# Altium PCB PULpino.PcbDoc
Units mm, origin at the board's own origin, x right, y up, seen from the top; angles counter-clockwise.
Board outline 63 x 34 mm, 2 copper layers (L1, L2), stack 1.671 mm thick; 36 components, 38 nets, 212 pads, 66 vias.
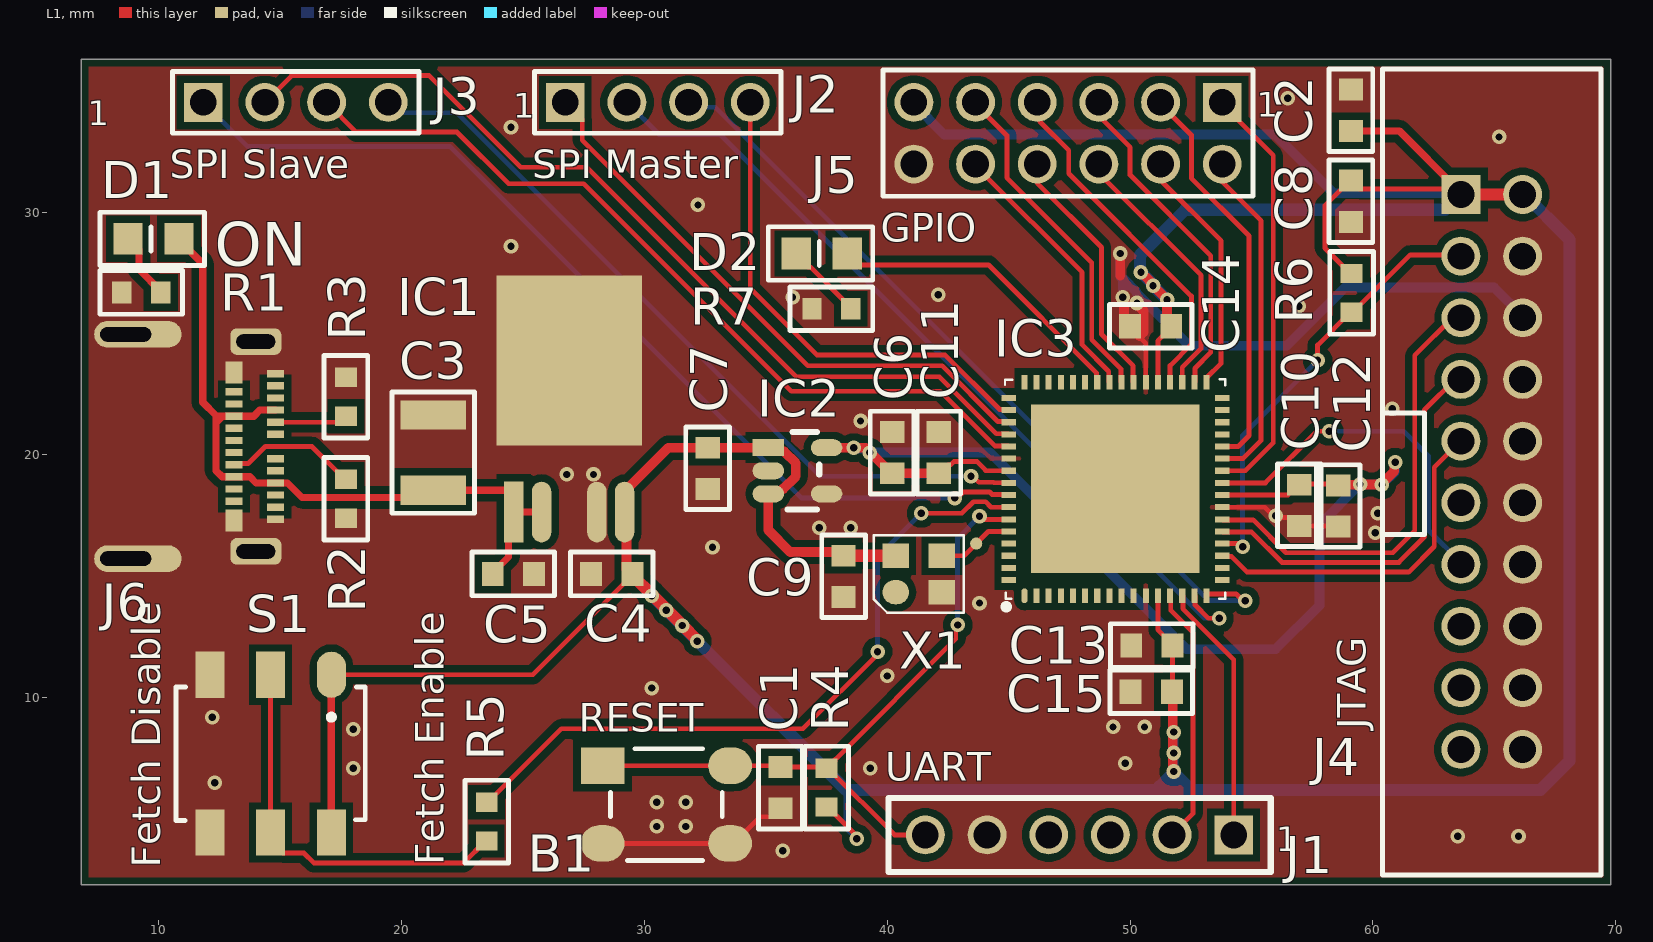
[diagram p0: L1 view]
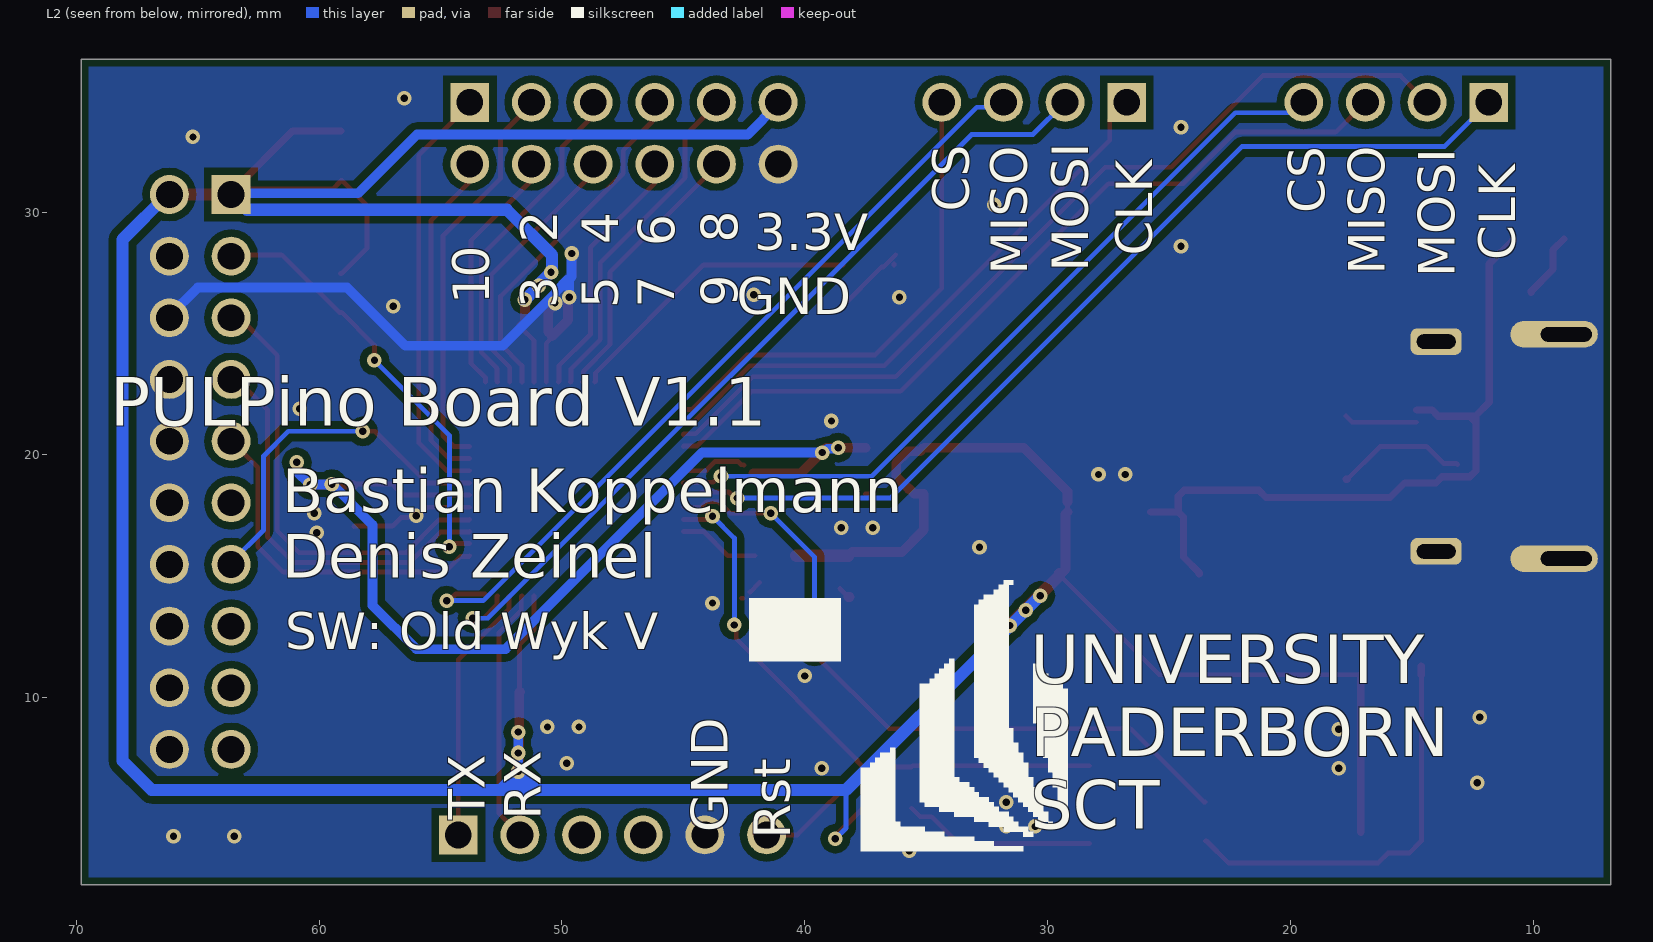
[diagram p1: L2 view, seen from below]
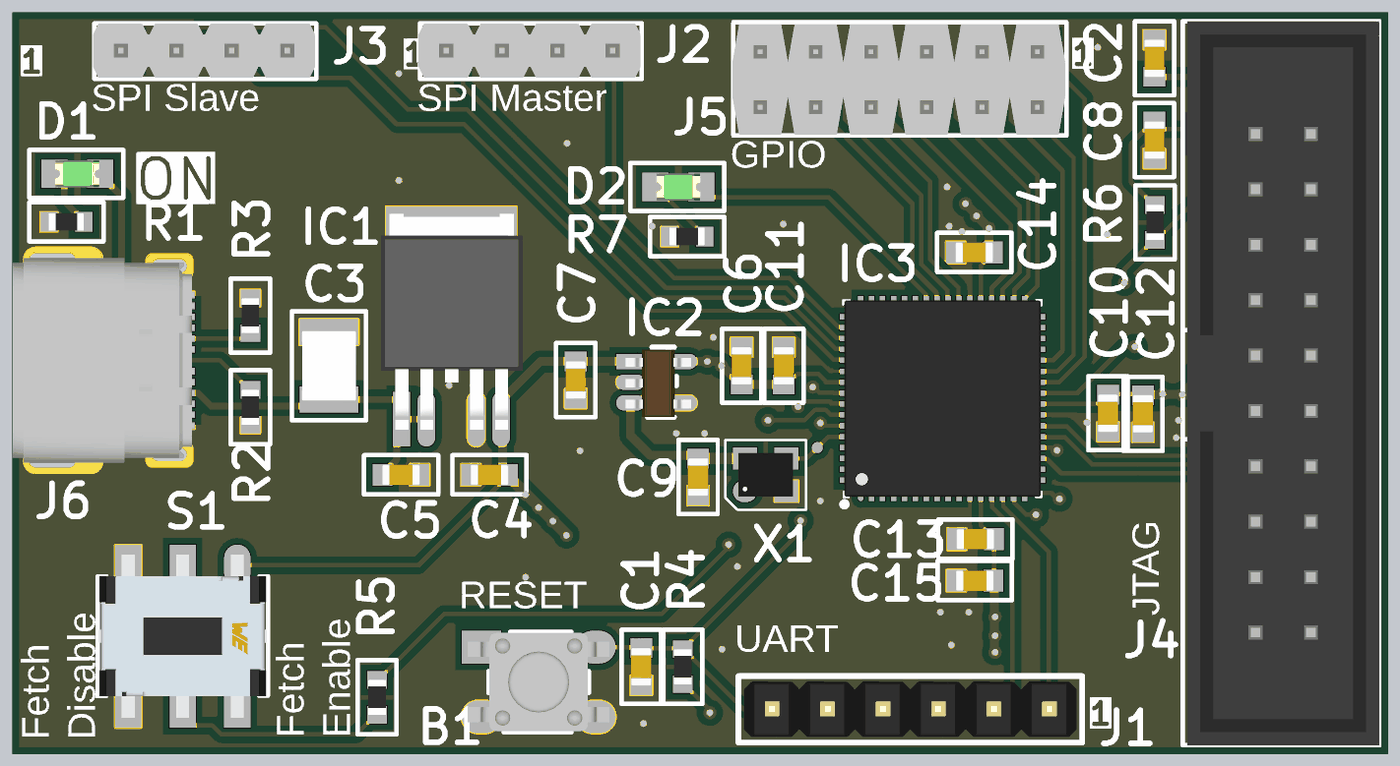
[diagram p2: 3D render of the assembled board from above, using the file's embedded part models]

## Layer stack, top to bottom
Top Solder: solder mask 0.0102, Solder Resist, Dk 3.5
L1: signal copper 0.0356
Dielectric 1: dielectric 1.6, FR-4, Dk 4.8
L2: signal copper 0.0356
Bottom Solder: solder mask 0.0102, Solder Resist, Dk 3.5

## Board outline
6.8,2.3 69.8,2.3 69.8,36.3 6.8,36.3

## Design rules (kind name [scope] priority, off if disabled: settings)
BoardOutlineClearance [All] p1: gap=0.2 ignorepadtopadclearanceinfootprint=FALSE
Clearance "Arround Polygon" [IsRegion] p1: gap=0.3 ignorepadtopadclearanceinfootprint=FALSE
Clearance [All] p2: gap=0.2 ignorepadtopadclearanceinfootprint=FALSE
DiffPairsRouting [All] p1: maxlimit=0.35 minlimit=0.3 mostfreqgap=0.35 toplayer_minwidth=0.205 toplayer_maxwidth=0.254 toplayer_prefwidth=0.23 bottomlayer_minwidth=0.205 bottomlayer_maxwidth=0.254 bottomlayer_prefwidth=0.23 maxuncoupledlength=12.7
FabricationTestPointUsage FabricationTestPointUsage_1 [All] p1: valid=0 allowmultiple=FALSE
FabricationTestpoint FabricationTestpoint_1 [All] p1: side=3 testpointundercomponent=TRUE minsize=1.016 maxsize=2.54 preferedsize=1.524 minholesize=0 maxholesize=1.016 preferedholesize=0.813 testpointgrid=0.025 allowsidetop=TRUE allowsidebottom=TRUE usegrid=TRUE gridtolerance=0
FabricationTestpoint FabricationTestpoint_2 [All] p2: side=3 testpointundercomponent=TRUE minsize=1.016 maxsize=2.54 preferedsize=1.524 minholesize=0 maxholesize=1.016 preferedholesize=0.813 testpointgrid=0.025 allowsidetop=TRUE allowsidebottom=TRUE usegrid=TRUE gridtolerance=0
HoleSize FabricationTestpoint [All] p1 off: absolutevalues=TRUE maxlimit=2.54 minlimit=0.03 maxpercent=80.000 minpercent=20.000
HoleSize [All] p2: absolutevalues=TRUE maxlimit=10 minlimit=0.3 maxpercent=80.000 minpercent=20.000
HoleSize FabricationTestPointUsage [All] p3 off: absolutevalues=TRUE maxlimit=2.54 minlimit=0.03 maxpercent=80.000 minpercent=20.000
MinimumSolderMaskSliver SilkscreenOverComponentPads [All] p1: minsoldermaskwidth=0.1
MinimumSolderMaskSliver [All] p2: minsoldermaskwidth=0.08
PlaneClearance [All] p1: clearance=0.5
PolygonConnect [All] p1: connectstyle=Direct reliefconductorwidth=0.254 reliefentries=4 polygonreliefangle="90 Angle" airgapwidth=0.254
RoutingCorners [All] p1: cornerstyle=45-Degree minsetback=1.25 maxsetback=1.25
RoutingVias [All] p1: holewidth=0.3 width=0.6 viastyle="Through Hole" minholewidth=0.3 minwidth=0.6 maxholewidth=0.3 maxwidth=0.6
SilkToSilkClearance [All] p1: silktosilkclearance=0.1
SilkToSolderMaskClearance [IsPad] p1: minsilkscreentomaskgap=0.1 clearancetoexposedcopper=TRUE
SolderMaskExpansion [All] p1: expansion=0.05 istentingtop=FALSE
Width Width_POWER [InNet('+1.2V') or InNet('+3.3V')or InNet('+5V')or InNet('GND')] p1: maxlimit=2 minlimit=0.2 preferedwidth=0.3
Width [All] p2: maxlimit=4 minlimit=0.2 preferedwidth=0.3
21 further rules are at their usual default settings.

## Classes and differential pairs
net class GPIO_[0..9]: GPIO_0 GPIO_1 GPIO_2 GPIO_3 GPIO_4 GPIO_5 GPIO_6 GPIO_7 GPIO_8 GPIO_9

## Components (designator, comment, footprint, x,y, rotation, side; value= is the part's Value field where it differs from the comment)
B1 "Push Button" "PUSH SWITCH" 30.9,5.6 r0 top
C1 "100nF/ 50V" C0603 35.6,6.3 r270 top
C2 "100nF/ 50V" C0603 59.1,34.2 r270 top
C3 "47µF/ 16V" C1210 21.3,20.1 r270 top
C4 "1µF/ 16V" C0603 28.65,15.1 r0 top
C5 "100nF/ 50V" C0603 24.6,15.1 r180 top
C6 "1µF/ 16V" C0603 40.2,20.1 r270 top
C7 "100nF/ 50V" C0603 32.6,19.45 r90 top
C8 "100nF/ 50V" C0603 59.1,30.45 r270 top
C9 "100nF/ 50V" C0603 38.2,15 r270 top
C10 "100nF/ 50V" C0603 56.975,17.925 r90 top
C11 "100nF/ 50V" C0603 42.125,20.1 r270 top
C12 "1µF/ 16V" C0603 58.575,17.9 r90 top locked
C13 "100nF/ 50V" C0603 50.9,12.15 r0 top
C14 "100nF/ 50V" C0603 50.85,25.3 r0 top
C15 "1µF/ 16V" C0603 50.875,10.25 r0 top
D1 "Green LED" LED_0805 9.775,28.9 r180 top
D2 "Green LED" LED_0805 37.3,28.3 r180 top
IC1 "TLS850B0TEV33ATMA1" TO-252-5 24.62,17.65 r90 top
IC2 "NCP115ASN120T2G" TSOP-5 35.1,20.3 r0 top
IC3 "PULPino V1 by Bastian Koppelmann" "MQFN 64-LEAD 9MM P=0.5MM" 45.65,14.2 r90 top
J1 "Header_6pin_Male" HEADER_6PIN_MALE 54.27,4.35 r180 top
J2 "4-Pin 2.54 Male" "DIP4 4X1 PITCH 2.54MM" 26.735,34.525 r0 top
J3 "4-Pin 2.54 Male" "DIP4 4X1 PITCH 2.54MM" 11.825,34.525 r0 top
J4 "JTAG 20 Pin Male 2.54mm" "JTAG 20-PIN" 63.63,30.73 r90 top locked
J5 "2x6 Pin Male 2.54mm" "DIP12 2X6 PITCH 2.54MM" 41.095,34.525 r180 top
J6 "USB-C Molex 201267-0005" "USB-C MOLEX 2012670005" 14.8,23.35 r270 top
R1 "150" R0603 8.475,26.7 r0 top
R2 "5k" R0603 17.7,17.4 r90 top
R3 "5k" R0603 17.7,23.2 r270 top
R4 "10k" R0603 37.5,7.1 r270 top
R5 "10k" R0603 23.5,4.1 r90 top
R6 "10k" R0603 59.125,25.875 r90 top
R7 "100" R0603 36.9,26.025 r0 top
S1 "Slide Switch" "SLIDE SWITCH WE 452403012014" 14.6,7.7 r180 top
X1 "50MHz" "QFN 2520 SiT1602 Oscillators 2.5x2.0mm" 41.3,15.1 r0 top

## Footprints (in the part's own frame and the unit in brackets; to place one, negate y for a bottom-side part, rotate by r counter-clockwise, add the part's x,y. Pads: shape width x height; smd on the part's side, far side on the other; paste and mask are expansions set on the pad)
C0603 [mm]
  rect 0.9x1 smd: 1(-0.85,0) 2(0.85,0)
  silkscreen extent -1.7,-0.9 1.7,0.9, body extent -0.87,-0.48 0.87,0.48, height 0.88
C1210 [mm]
  rect 1.2x2.7 smd: 1(-1.55,0) 2(1.55,0)
  silkscreen extent -2.5,-1.7 2.5,1.7, body extent -1.6,-1.25 1.6,1.25, height 1
"DIP4 4X1 PITCH 2.54MM" [mm]
  rect 1.6x1.6 hole 1.1: 1(0,0)
  round 1.6 hole 1.1: 2(2.54,0) 3(5.08,0) 4(7.62,0)
  silkscreen extent -1.27,-1.27 8.89,1.28, body extent -1.33,-1.22 8.83,1.28, height 9.26
"DIP12 2X6 PITCH 2.54MM" [mm]
  rect 1.6x1.6 hole 1.1: 1(-12.7,0)
  round 1.6 hole 1.1: 2(-12.7,2.54) 3(-10.16,0) 4(-10.16,2.54) 5(-7.62,0) 6(-7.62,2.54) 7(-5.08,0) 8(-5.08,2.54) 9(-2.54,0) 10(-2.54,2.54) 11(0,0) 12(0,2.54)
  silkscreen extent -13.97,-1.33 1.28,3.87, body extent -13.92,-1.24 1.32,3.84, height 9.26
HEADER_6PIN_MALE [mm]
  rect 1.6x1.6 hole 1.1: 1(0,0)
  round 1.6 hole 1.1: 2(2.54,0) 3(5.08,0) 4(7.62,0) 5(10.16,0) 6(12.7,0)
  silkscreen extent -1.52,-1.52 14.22,1.52, body extent -1.27,-1.27 13.97,1.27, height 9.2
"JTAG 20-PIN" [mm]
  rect 1.6x1.6 hole 1.1: 1(0,0)
  round 1.6 hole 1.1: 2(0,-2.54) 3(-2.54,0) 4(-2.54,-2.54) 5(-5.08,0) 6(-5.08,-2.54) 7(-7.62,0) 8(-7.62,-2.54) 9(-10.16,0) 10(-10.16,-2.54) 11(-12.7,0) 12(-12.7,-2.54) 13(-15.24,0) 14(-15.24,-2.54) 15(-17.78,0) 16(-17.78,-2.54) 17(-20.32,0) 18(-20.32,-2.54) 19(-22.86,0) 20(-22.86,-2.54)
  silkscreen extent -28.03,-5.77 5.17,3.23, body extent -28.03,-5.77 5.17,3.13, height 9
LED_0805 [mm] "Würth Elektronik (WE)"
  rect 1.2x1.3 smd: 1(-1.05,0) 2(1.05,0)
  silkscreen extent -2.1,-1.1 2.2,1.1, body extent -1.01,-0.62 1.01,0.63, height 1.1
"MQFN 64-LEAD 9MM P=0.5MM" [mm]
  oval 0.6x0.25 smd: 1(0,0)
  rect 0.6x0.25 smd: 2(0,-0.5) 3(0,-1) 4(0,-1.5) 5(0,-2) 6(0,-2.5) 7(0,-3) 8(0,-3.5) 9(0,-4) 10(0,-4.5) 11(0,-5) 12(0,-5.5) 13(0,-6) 14(0,-6.5) 15(0,-7) 16(0,-7.5) 33(8.8,-7.5) 34(8.8,-7) 35(8.8,-6.5) 36(8.8,-6) 37(8.8,-5.5) 38(8.8,-5) 39(8.8,-4.5) 40(8.8,-4) 41(8.8,-3.5) 42(8.8,-3) 43(8.8,-2.5) 44(8.8,-2) 45(8.8,-1.5) 46(8.8,-1) 47(8.8,-0.5) 48(8.8,0)
  rect 0.25x0.6 smd: 17(0.65,-8.15) 18(1.15,-8.15) 19(1.65,-8.15) 20(2.15,-8.15) 21(2.65,-8.15) 22(3.15,-8.15) 23(3.65,-8.15) 24(4.15,-8.15) 25(4.65,-8.15) 26(5.15,-8.15) 27(5.65,-8.15) 28(6.15,-8.15) 29(6.65,-8.15) 30(7.15,-8.15) 31(7.65,-8.15) 32(8.15,-8.15) 49(8.15,0.65) 50(7.65,0.65) 51(7.15,0.65) 52(6.65,0.65) 53(6.15,0.65) 54(5.65,0.65) 55(5.15,0.65) 56(4.65,0.65) 57(4.15,0.65) 58(3.65,0.65) 59(3.15,0.65) 60(2.65,0.65) 61(2.15,0.65) 62(1.65,0.65) 63(1.15,0.65) 64(0.65,0.65)
  rect 6.94x6.94 smd: 65(4.4,-3.75)
  silkscreen extent -0.49,-8.27 8.93,0.8, body extent -0.12,-8.27 8.92,0.77, height 0.9
"PUSH SWITCH" [mm]
  rect 1.8x1.5 smd: 1(-2.625,1.6)
  oval 1.8x1.5 smd: 2(-2.625,-1.6) 3(2.625,1.6) 4(2.625,-1.6)
  silkscreen extent -2.3,-2.3 2.3,2.3, body extent -3.25,-2.25 3.25,2.25, height 5
"QFN 2520 SiT1602 Oscillators 2.5x2.0mm" [mm]
  oval 1.1x1 smd: 1(-0.95,-0.75)
  rect 1.1x1 smd: 2(0.95,-0.75) 3(0.95,0.75) 4(-0.95,0.75)
  silkscreen extent -1.85,-1.6 1.85,1.6, body extent -1.25,-1 1.25,1, height 0.81
R0603 [mm]
  rect 0.8x0.9 smd: 1(0,0) 2(1.6,0)
  silkscreen extent -0.9,-0.9 2.5,0.9, body extent 0,-0.4 1.6,0.4, height 0.45
"SLIDE SWITCH WE 452403012014" [mm]
  oval 1.2x1.9 smd: 1(-2.5,-3.25)
  rect 1.2x1.9 smd: 2(0,-3.25) 3(2.5,-3.25) 4(-2.5,3.25) 5(0,3.25) 6(2.5,3.25)
  silkscreen extent -3.9,-2.75 3.9,2.75, body extent -3.85,-3.75 3.85,3.75, height 3.3
TO-252-5 [mm]
  rect 2.5x0.8 smd: 1(0,0)
  oval 2.5x0.8 smd: 2(0,-1.14) 4(0,-3.42) 5(0,-4.56)
  rect 7x6 smd: 3(6.25,-2.28)
  body extent -0.47,-5.55 9.43,0.95, height 2.3
TSOP-5 [mm]
  rect 1.3x0.7 smd: 1(0,0)
  oval 1.3x0.7 smd: 2(0,-0.95) 3(0,-1.9) 4(2.4,-1.9) 5(2.4,0)
  silkscreen extent 0.8,-2.55 2.1,0.65, body extent -0.23,-2.55 2.77,0.55, height 1.1
"USB-C MOLEX 2012670005" [mm]
  oval 1.1x3.6 hole 2.1 slot 0.6 at 0 deg copper offset 0,0.5: A1(-1.62,-6.17) A1(7.62,-6.17)
  rrect50% 1.1x2.1 hole 1.6 slot 0.6 at 0 deg: A1(-1.32,-0.81) A1(7.32,-0.81)
  rect 0.3x0.7 smd: A1(0,0) A2(0.5,0) A3(1,0) A4(1.5,0) A5(2,0) A6(2.5,0) A7(3.5,0) A8(4,0) A9(4.5,0) A10(5,0) A11(5.5,0) A12(6,0) B2(5.25,-1.7) B3(4.75,-1.7) B4(4.25,-1.7) B5(3.75,-1.7) B6(3.25,-1.7) B7(2.75,-1.7) B8(2.25,-1.7) B9(1.75,-1.7) B10(1.25,-1.7) B11(0.75,-1.7)
  rect 0.9x0.7 smd: B1(6.05,-1.7) B12(-0.05,-1.7)
  body extent -1.69,-7.97 7.69,0.33, height 3.72

## Part data
B1: library part "Push Button PTS647SM50SMTR2LFS", "PTS647SM50SMTR2LFS"
C1 C2 C5 C7 C8 C9 C10 C11 C13 C14: library part "C 100nF/ 50V", "C0603/C0805"
C3: library part "C 47µF/ 16V", "C1210"
C4 C6 C12 C15: library part "C 1µF/ 16V", "C0603/C0805"
D1 D2: library part "LED 0805", "Status LED"
IC1: "Input 3-40V, Output 3.3V"
IC2: "Input 1.7V-5.5V, Ouput 1.2V"
IC3: library part "MCU PULPino V1 QFN64", "Version 1 PULPino by Bastian Koppelmann"
J2 J3: library part "Molex 90120-0124 1x4 Pin Male 2.54mm"
J4: library part "JTAG 20-Pin 2.54 ARM USB-Tiny H"
J5: library part "Molex 90131-1086 2x6 PIn Header_1"
R1: library part RES_150, "0603/0805"
R2 R3: library part RES_5k, "0603/0805"
R4 R5 R6: library part RES_10k, "0805"
R7: library part RES_100, "0603/0805"
S1: library part "Slide Switch WE 452403012014", "Slide Switch, WE 452403012014"
X1: library part SiT1602BC-11-33N-50.000000, "Oscillator 50MHz. Pin 1 NC"

## Free pads (board coordinates)
  round 0.5 smd: ""(43.663,16.35)

## Via types
v1: diameter 0.6, hole 0.3, L1 to L2, tented both sides, 66 vias

## Nets (pads, with @x,y where several pads share a name; then routed paths per layer and width w, separated by ;. In a path a pad name is that pad's centre, name@x,y a point inside that pad or via, vN(x,y) a via of type N, cw(c..) or ccw(c..) an arc to the next point about the centre after c; other vN are vias at no path point)
+1.2V: C6.2 C10.2 C11.2 C12.2 IC2.5 IC3.24 IC3.55 | length 46.7
  L1 w0.2: C6.2@40.15,19.25 C6.2 ; C11.2@42.5,19.575 42.525,19.6 42.619,19.6 42.744,19.725 43.699,19.725 44.05,19.374 44.05,19.35 IC3.55 ; IC3.24 56.5,18.35 56.75,18.6 56.8,18.6 C10.2 ; C10.2@56.975,18.8 C12.2@58.625,18.8
  L1 w0.4: IC2.5 39.1,20.3 C6.2@40.15,19.25 ; C6.2 C11.2 ; C12.2 58.6,18.775 59.45,18.775 v1(59.475,18.8) 59.487,18.788 60.363,18.788 v1(60.375,18.775) ; v1@60.375,18.829 60.887,19.341 v1@60.887,19.662
  L2 w0.4: v1(38.625,20.3) 38.663,20.262 39.059,20.262 39.221,20.1 v1(39.275,20.1) 44.225,20.1 52.325,12 56,12 57.8,13.8 57.8,17.125 v1(59.475,18.8) ; v1@59.487,18.788 v1@60.363,18.788 ; v1(60.375,18.775) 60.925,19.325 v1(60.925,19.7)
+3.3V: C2.2 C4.2 C7.2 C8.1 C9.1 C13.2 C14.2 C15.2 IC1.5 IC2.1 IC2.3 IC3.12 IC3.37 J4.1 J4.2 J5.11 R4.2 R6.2 S1.1 S1.4 X1.4 | length 191
  L1 w0.2: S1.1 25.4,10.95 C4.2@29.5,15.05 ; IC1.5 IC1.5@29.18,18.075 ; R4.2 37.55,5.5 38.663,4.387 38.663,4.268 v1(38.74,4.191) ; IC3.12 51.15,12.8 51.75,12.2 C13.2 51.75,10.275 C15.2 ; IC3.37 51.15,24.7 51.7,25.25 C14.2 ; R6.2 59.075,27.475 58.025,28.525 58.025,30.275 59.05,31.3 C8.1 59.45,30.95 J4.1@63.49,30.95
  L1 w0.3: S1.4 S1.1 ; C2.2 61.09,33.35 J4.1@63.49,30.95
  L1 w0.4: IC1.5 29.257,17.573 29.257,15.293 C4.2@29.475,15.075 ; IC1.5@29.18,18.075 29.18,18.5 30.98,20.3 C7.2@32.65,20.3 ; C7.2 C7.2@32.65,20.3 ; C9.1 38.05,16 36,16 35.1,16.9 IC2.3 35.481,18.4 35.681,18.6 35.711,18.6 36.234,19.124 36.234,19.666 35.75,20.15 35.25,20.15 IC2.1 C7.2@32.65,20.3 ; v1@50.438,27.541 50.775,27.204 50.95,27.029 v1(50.95,26.975) v1(51.525,26.4) 51.525,25.475 C14.2 ; C15.2 51.762,10.213 v1@51.762,6.963
  L1 w0.5: C4.2 29.5,15.05 30.325,14.225 30.925,13.625 31.562,12.988 32.156,12.394 32.156,12.344 v1(32.175,12.325) ; C9.1 X1.4 ; J4.1 J4.2
  L2 w0.2: 38.3,6.2 38.3,4.631 v1(38.74,4.191)
  L2 w0.4: J5.11@41.095,34.45 42.345,33.2 55.975,33.2 58.395,30.78 63.66,30.78 J4.1@62.98,30.1 ; v1@50.411,27.569 v1(50.449,27.53) ; v1@50.438,27.541 v1@50.438,27.737 ; v1(50.95,26.975) v1@50.95,27.029 ; 51.8,6.2 51.8,6.935 v1(51.8,6.963) v1(51.8,7.725) v1(51.8,8.588)
  L2 w0.5: v1(30.3,14.2) v1(32.175,12.325) 38.3,6.2 51.8,6.2 ; v1@50.411,27.569 50.411,28.239 52.271,30.1 J4.1@62.98,30.1 ; v1@50.438,27.541 v1@50.95,27.029 ; v1(50.95,26.975) v1(51.525,26.4) ; 51.2,6.335 v1@51.8,6.935 ; 52.5,6.235 v1@51.8,6.935 ; J4.2@66.2,30.78 68.1,28.88 68.1,7.4 66.9,6.2 51.8,6.2 ; 51.8,6.2 v1@51.8,6.935
  other v1: 31.55,12.975 30.9,13.6
+5V: C3.2 C5.2 D1.1 IC1.1 IC1.2 J6.A4 J6.A9 J6.B4 J6.B9 | length 30.8
  L1 w0.3: D1.1 10.825,28.85 11.8,27.875 11.8,22.175 12.35,21.625 ; 12.35,21.35 12.355,21.35 12.605,21.6 ; J6.A4 14.15,21.85 13.9,21.6 J6.B9 12.375,21.6 12.35,21.625 ; C5.2 23.75,15.15 24.4,15.8 24.4,17.43 IC1.1 ; IC1.2 IC1.1 ; 12.35,21.625 12.35,19.355 12.605,19.1 J6.B4 13.75,19.1 14,18.85 J6.A9 15.295,18.85 15.895,18.25 21,18.25 C3.2 24.37,18.55 24.62,18.3 IC1.1
CC1: J6.A5 R3.2 | length 3
  L1 w0.2: J6.A5 17.45,21.35 R3.2
CC2: J6.B5 R2.2 | length 5.5
  L1 w0.2: J6.B5 13.15,19.65 13.676,19.65 14.376,20.35 16.3,20.35 R2.2@17.65,19
  L1 w0.3: R2.2@17.65,19 R2.2
CLK: IC3.60 pad. X1.3 | length 3.4
  L1 w0.2: X1.3@42.05,15.85 43.163,15.85 44.162,16.85 IC3.60
FetchEN: IC3.58 R5.2 | length 29.1
  L1 w0.2: R5.2 23.55,5.7 26.575,8.725 36.525,8.725 39.6,11.8 v1(39.6,11.9) ; v1(41.4,17.6) 43.076,17.6 43.551,18.075 44.049,18.075 44.274,17.85 IC3.58
  L2 w0.2: v1(39.6,11.9) 39.6,15.8 v1(41.4,17.6)
GND: B1.2 B1.4 C1.2 C2.1 C3.1 C4.1 C5.1 C6.1 C7.1 C8.2 C9.2 C10.1 C11.1 C12.1 C13.1 C14.1 C15.1 IC1.3 IC1.4 IC2.2 IC2.4 IC3.11 IC3.23 IC3.38 IC3.54 J1.5 J4.4 J4.6 J4.8 J4.10 J4.12 J4.14 J4.16 J4.18 J4.20 J5.12 J6.A1 J6.A12 J6.B1 J6.B12 R1.1 R2.1 R3.1 R7.1 S1.3 S1.6 X1.2 | length 41.8
  L1 w0.2: B1.2 B1.4 33.675,4 34.775,5.1 35.25,5.1 C1.2 ; IC2.4@37.2,18.4 IC2.4 ; C9.2 C9.2@38.55,14.5 ; X1.2@41.85,14.75 X1.2 ; X1.2@42.55,14.1 X1.2@42.6,14.1 ; C14.1@50.375,24.875 50.65,24.6 IC3.38 ; IC3.23 55.542,17.85 55.892,17.5 v1(56,17.5) 56.075,17.425 56.625,17.425 C10.1 58.55,17.075 C12.1
  L1 w0.4: C9.2@38.15,14.15 C9.2 ; 49.6,27.389 v1(49.6,28.3) ; v1(49.7,26.5) 49.7,26.446 49.75,26.396 49.75,25.55 50.4,24.9 50.562,25.062 50.562,25.93 50.285,26.207 v1(50.285,26.261) v1@50.247,26.299
  L2 w0.4: v1(49.6,28.3) 49.6,27.34 49.7,27.24 v1(49.7,26.5) ; 49.749,27.24 50.25,26.739 50.25,26.685 52.435,24.5 56.456,24.5 58.856,26.9 65,26.9 J4.6@66.2,25.7
  other v1: 35.7,3.7 63.5,4.3 66,4.3 30.5,4.7 31.7,4.7 30.5,5.7 31.7,5.7 12.3,6.5 18,7.1 39.3,7.1 49.8,7.3 18,8.7 49.3,8.8 50.6,8.8 12.2,9.2 30.3,10.4 40,10.9 43.8,13.9 32.8,16.2 60.1,16.8 37.2,17 38.5,17 60.2,17.6 26.8,19.2 27.9,19.2 38.9,21.4 60.8,21.9 56.95,26.125 36.1,26.5 42.1,26.6 24.5,28.6 32.2,30.3 65.2,33.1 24.5,33.5 56.5,34.7
GPIO_0: IC3.26 J5.1 | length 17.4
  L1 w0.2: J5.1@53.795,34.45 55.9,32.345 55.9,20.5 54.75,19.35 IC3.26
GPIO_1: IC3.27 J5.2 | length 13.9
  L1 w0.2: J5.2@53.795,31.91 53.795,31.255 55.4,29.65 55.4,20.6 54.65,19.85 IC3.27
GPIO_2: IC3.28 J5.3 | length 16.4
  L1 w0.2: J5.3@51.255,34.45 52.525,33.18 52.525,31.4 54.9,29.025 54.9,20.8 54.45,20.35 IC3.28
GPIO_3: IC3.33 J5.4 | length 10.2
  L1 w0.2: J5.4@51.255,31.91 51.255,31.32 53.75,28.825 53.75,23.775 53.15,23.175 IC3.33
GPIO_4: IC3.34 J5.5 | length 13.6
  L1 w0.2: J5.5@48.715,34.45 48.831,34.334 48.831,33.844 50,32.675 50,31.534 53.325,28.209 53.325,24.225 52.675,23.575 52.675,23.025 IC3.34
GPIO_5: IC3.35 J5.6 | length 11
  L1 w0.2: J5.6@48.715,31.91 48.715,31.61 52.925,27.4 52.925,24.391 52.15,23.616 IC3.35
GPIO_6: IC3.36 J5.7 | length 14.4
  L1 w0.2: J5.7@46.175,34.45 46.291,34.334 46.291,33.734 47.475,32.55 47.475,31.594 52.525,26.544 52.525,24.556 51.65,23.681 IC3.36
GPIO_7: IC3.39 J5.8 | length 10.6
  L1 w0.2: J5.8@46.175,31.91 46.175,31.2 48.825,28.55 48.825,24.975 50.125,23.675 50.125,23.025 IC3.39
GPIO_8: IC3.40 J5.9 | length 13.9
  L1 w0.2: J5.9@43.635,34.45 44.925,33.16 44.925,31.425 48.425,27.925 48.425,24.75 49.625,23.55 49.625,23.025 IC3.40
GPIO_9: IC3.41 J5.10 | length 11.1
  L1 w0.2: J5.10@43.635,31.675 43.87,31.675 48.025,27.52 48.025,24.54 49.125,23.44 49.125,23.025 IC3.41
GPIO_10: D2.1 IC3.42 | length 12.5
  L1 w0.2: D2.1@38.425,27.875 38.425,27.825 44.174,27.825 48.625,23.374 48.625,23.025 IC3.42
JTAG_TCK: IC3.19 J4.9 | length 14.3
  L1 w0.2: IC3.19 53.825,15.825 54.175,15.825 54.825,15.175 61.475,15.175 62.53,16.23 62.53,19.49 J4.9@63.66,20.62
JTAG_TDI: IC3.22 J4.5 | length 18.7
  L1 w0.2: IC3.22 53.825,17.325 55.075,17.325 56.425,15.975 60.825,15.975 61.73,16.88 61.73,24.105 63.325,25.7 J4.5@63.66,25.7
JTAG_TDO: IC3.25 J4.13 | length 14.8
  L1 w0.2: IC3.25 55.575,18.85 57.7,20.975 v1(58.2,20.975)
  L2 w0.2: v1(58.2,20.975) 61.275,20.975 62.294,19.956 62.294,16.906 J4.13@63.66,15.54
JTAG_TMS: IC3.21 J4.7 | length 16.6
  L1 w0.2: IC3.21 53.825,16.825 55.009,16.825 56.259,15.575 61.075,15.575 62.13,16.63 62.13,21.855 63.435,23.16 J4.7@63.66,23.16
JTAG_TRSTN: IC3.20 J4.3 R6.1 | length 17.9
  L1 w0.2: IC3.20 54.405,16.35 54.53,16.225 v1(54.638,16.225) ; v1(57.725,23.9) 57.725,24.525 59.075,25.875 R6.1 59.175,25.875 61.54,28.24 J4.3@63.66,28.24
  L2 w0.2: v1(54.638,16.225) 54.638,20.813 v1(57.725,23.9)
NetD1_2: D1.2 R1.2 | length 2.8
  L1 w0.3: D1.2 9.175,28.45 9.175,27.65 10.075,26.75 R1.2
NetD2_2: D2.2 R7.2 | length 3.3
  L1 w0.2: D2.2@36.25,28.25 36.75,27.75 36.825,27.75 38.5,26.075 R7.2 ; D2.2@36.325,27.825 D2.2@36.325,27.875
NetR5_1: R5.1 S1.2 S1.5 | length 16.8
  L1 w0.2: S1.2 S1.5 14.6,4.1 15.1,3.6 15.976,3.6 16.376,3.2 22.55,3.2 23.45,4.1 R5.1
  L1 w0.3: S1.2 S1.2@14.6,11.3
RESET: B1.1 B1.3 C1.1 IC3.59 J1.6 R4.1 | length 28.7
  L1 w0.2: B1.1 B1.3 35.55,7.2 C1.1 37.5,7.15 R4.1@37.55,7.1 ; R4.1 R4.1@37.55,7.1 ; J1.6 40.3,4.35 R4.1@37.55,7.1 ; v1(42.9,13) 42.823,12.923 42.823,12.424 37.85,7.45 37.85,7.4 R4.1@37.55,7.1 ; v1(43.8,17.475) 43.908,17.475 44.033,17.35 IC3.59
  L2 w0.2: v1(42.9,13) 42.9,16.575 v1(43.8,17.475)
SPI_MASTER_CLK: IC3.51 J2.1 | length 24.2
  L1 w0.2: J2.1 27.435,33.825 27.435,32.965 36.725,23.675 42.26,23.675 44.56,21.375 44.975,21.375 IC3.51
SPI_MASTER_CS: IC3.50 J2.4 | length 20.4
  L1 w0.2: J2.4 34.355,26.87 37.1,24.125 42.376,24.125 44.626,21.875 44.975,21.875 IC3.50
SPI_MASTER_MISO: IC3.16 J2.3 | length 33.2
  L1 w0.2: IC3.16 53.15,14.25 53.175,14.275 54.367,14.275 54.642,14 v1(54.75,14)
  L2 w0.2: J2.3 32.014,34.326 32.915,34.326 53.241,14 v1(54.75,14)
SPI_MASTER_MOSI: IC3.15 J2.2 | length 34.8
  L1 w0.2: IC3.15 52.675,14.175 52.675,13.826 53.226,13.275 v1(53.675,13.275)
  L2 w0.2: J2.2 30.6,33.2 33.125,33.2 53.05,13.275 v1(53.675,13.275)
SPI_SLAVE_CLK: IC3.57 J3.1 | length 40.1
  L1 w0.2: v1(42.777,18.226) 42.885,18.226 43.134,18.475 44.214,18.475 44.314,18.375 44.975,18.375 IC3.57
  L2 w0.2: J3.1 13.65,32.7 22,32.7 36.474,18.226 v1(42.777,18.226)
SPI_SLAVE_CS: IC3.56 J3.4 | length 32
  L1 w0.2: v1(43.45,19.125) 43.517,19.125 43.767,18.875 44.38,18.875 44.4,18.855 44.995,18.855 IC3.56
  L2 w0.2: J3.4 19.87,34.1 22.266,34.1 37.241,19.125 v1(43.45,19.125)
SPI_SLAVE_MISO: IC3.53 J3.3 | length 34
  L1 w0.2: J3.3 18.13,33.3 22.275,33.3 24.4,31.175 27.5,31.175 36.05,22.625 42.179,22.625 44.429,20.375 44.975,20.375 IC3.53
SPI_SLAVE_MOSI: IC3.52 J3.2 | length 37.2
  L1 w0.2: J3.2 15.465,35.625 21.125,35.625 24.9,31.85 27.625,31.85 36.25,23.225 42.144,23.225 44.494,20.875 44.975,20.875 IC3.52
UART_RX: IC3.13 J1.2 | length 10.6
  L1 w0.2: IC3.13 51.674,14.176 51.674,13.6 52.6,12.674 52.6,5.236 51.73,4.366 J1.2
UART_TX: IC3.14 J1.1 | length 10.7
  L1 w0.2: IC3.14 52.175,14.175 52.175,13.665 54.27,11.57 J1.1
pads on no net: IC3.1 IC3.2 IC3.3 IC3.4 IC3.5 IC3.6 IC3.7 IC3.8 IC3.9 IC3.10 IC3.17 IC3.18 IC3.29 IC3.30 IC3.31 IC3.32 IC3.43 IC3.44 IC3.45 IC3.46 IC3.47 IC3.48 IC3.49 IC3.61 IC3.62 IC3.63 IC3.64 IC3.65 J1.3 J1.4 J4.11 J4.15 J4.17 J4.19 J6.A2 J6.A3 J6.A6 J6.A7 J6.A8 J6.A10 J6.A11 J6.B2 J6.B3 J6.B6 J6.B7 J6.B8 J6.B10 J6.B11 X1.1

## Polygon pours and split planes (outlines as drawn)
GND on L2 "L2-GND" (solid, remove dead copper, pour order 4): 7.1,2.6 69.5,2.6 69.5,36 7.1,36
GND on L1 "GND" (solid, remove dead copper, pour order 6): 7.1,2.6 7.1,36 69.5,36 69.5,2.6

## Silkscreen, mask and mechanical layers (free items; w line width, h text height)
Top Overlay:
  text "1" at 55.225,33.925 h1
  text "1" at 24.6,33.9 h1
  text "1" at 7.075,33.575 h1
  text "SPI Slave" at 10.45,31 h2
  text "SPI Master" at 25.375,31 h2
  text "GPIO" at 39.725,28.4 h2
  text "ON" at 12.3,27.8 h1.8
  text "JTAG" at 60.1,8.7 h2 r90
  text "RESET" at 27.3,8.2 h2
  text "UART" at 39.925,6.2 h2
  text "1" at 56.025,3.675 h1
  text "Fetch Enable" at 22.125,3.1 h2 r90
  text "Fetch Disable" at 10.45,3 h2 r90
Bottom Overlay:
  drawing of 5 lines, arcs and shapes, not listed
  text "CS" at 33.225,30.025 h1.5 r270
  text "CS" at 18.575,29.95 h1.5 r270
  text "8" at 42.75,28.75 h1.5 r270
  text "2" at 50.2,28.75 h1.5 r270
  text "4" at 47.675,28.675 h1.5 r270
  text "6" at 45.35,28.6 h1.5 r270
  text "3.3V" at 42.075,28.425 h1.5
  text "CLK" at 25.675,28.2 h1.5 r270
  text "CLK" at 10.725,28.025 h1.5 r270
  text "MOSI" at 28.325,27.55 h1.5 r270
  text "MISO" at 16.1,27.425 h1.5 r270
  text "MISO" at 30.825,27.425 h1.5 r270
  text "MOSI" at 13.225,27.325 h1.5 r270
  text "0" at 53,27.3 h1.5 r270
  text "1" at 53,26.2 h1.5 r270
  text "9" at 42.75,26.1 h1.5 r270
  text "7" at 45.375,26.075 h1.5 r270
  text "5" at 47.675,26.05 h1.5 r270
  text "3" at 50.2,26.05 h1.5 r270
  text "GND" at 42.8,25.8 h1.5
  text "PULPino Board V1.1" at 68.6,21.2 h2
  text "Bastian Koppelmann  / Denis Zeinel" at 61.525,14.95 h1.8
  text "SW: Old Wyk V" at 61.4,12 h1.5
  text "RX" at 50.875,4.975 h1.5 r270
  text "TX" at 53.175,4.975 h1.5 r270
  text "UNIVERSITY / PADERBORN / SCT" at 30.7,4.6 h2
  text "GND" at 43.175,4.45 h1.5 r270
  text "Rst" at 40.6,4.2 h1.5 r270
Board Outline:
  the board outline again, w0.2
Mechanical 29:
  text "Assembly TOP of PULPino Board V1.0" at -6.025,41.175 h3

## Dimensions
69.8,2.3 to 69.8,36.3 on Mechanical 16
6.8,2.3 to 69.8,2.3 on Mechanical 16